# Altium PCB IMX6WBED.PcbDoc (part 9 of 10)
Units mil, origin at the board's own origin, x right, y up, seen from the top; angles counter-clockwise.
Board outline 3318.23 x 4815.16 mil, 6 copper layers (Top Layer, L2_GND_1, L3_INT_1, L6_INT_2, L7_PWR_2, Bottom Layer), stack 27.7 mil thick; 504 components, 400 nets, 2357 pads, 1199 vias.
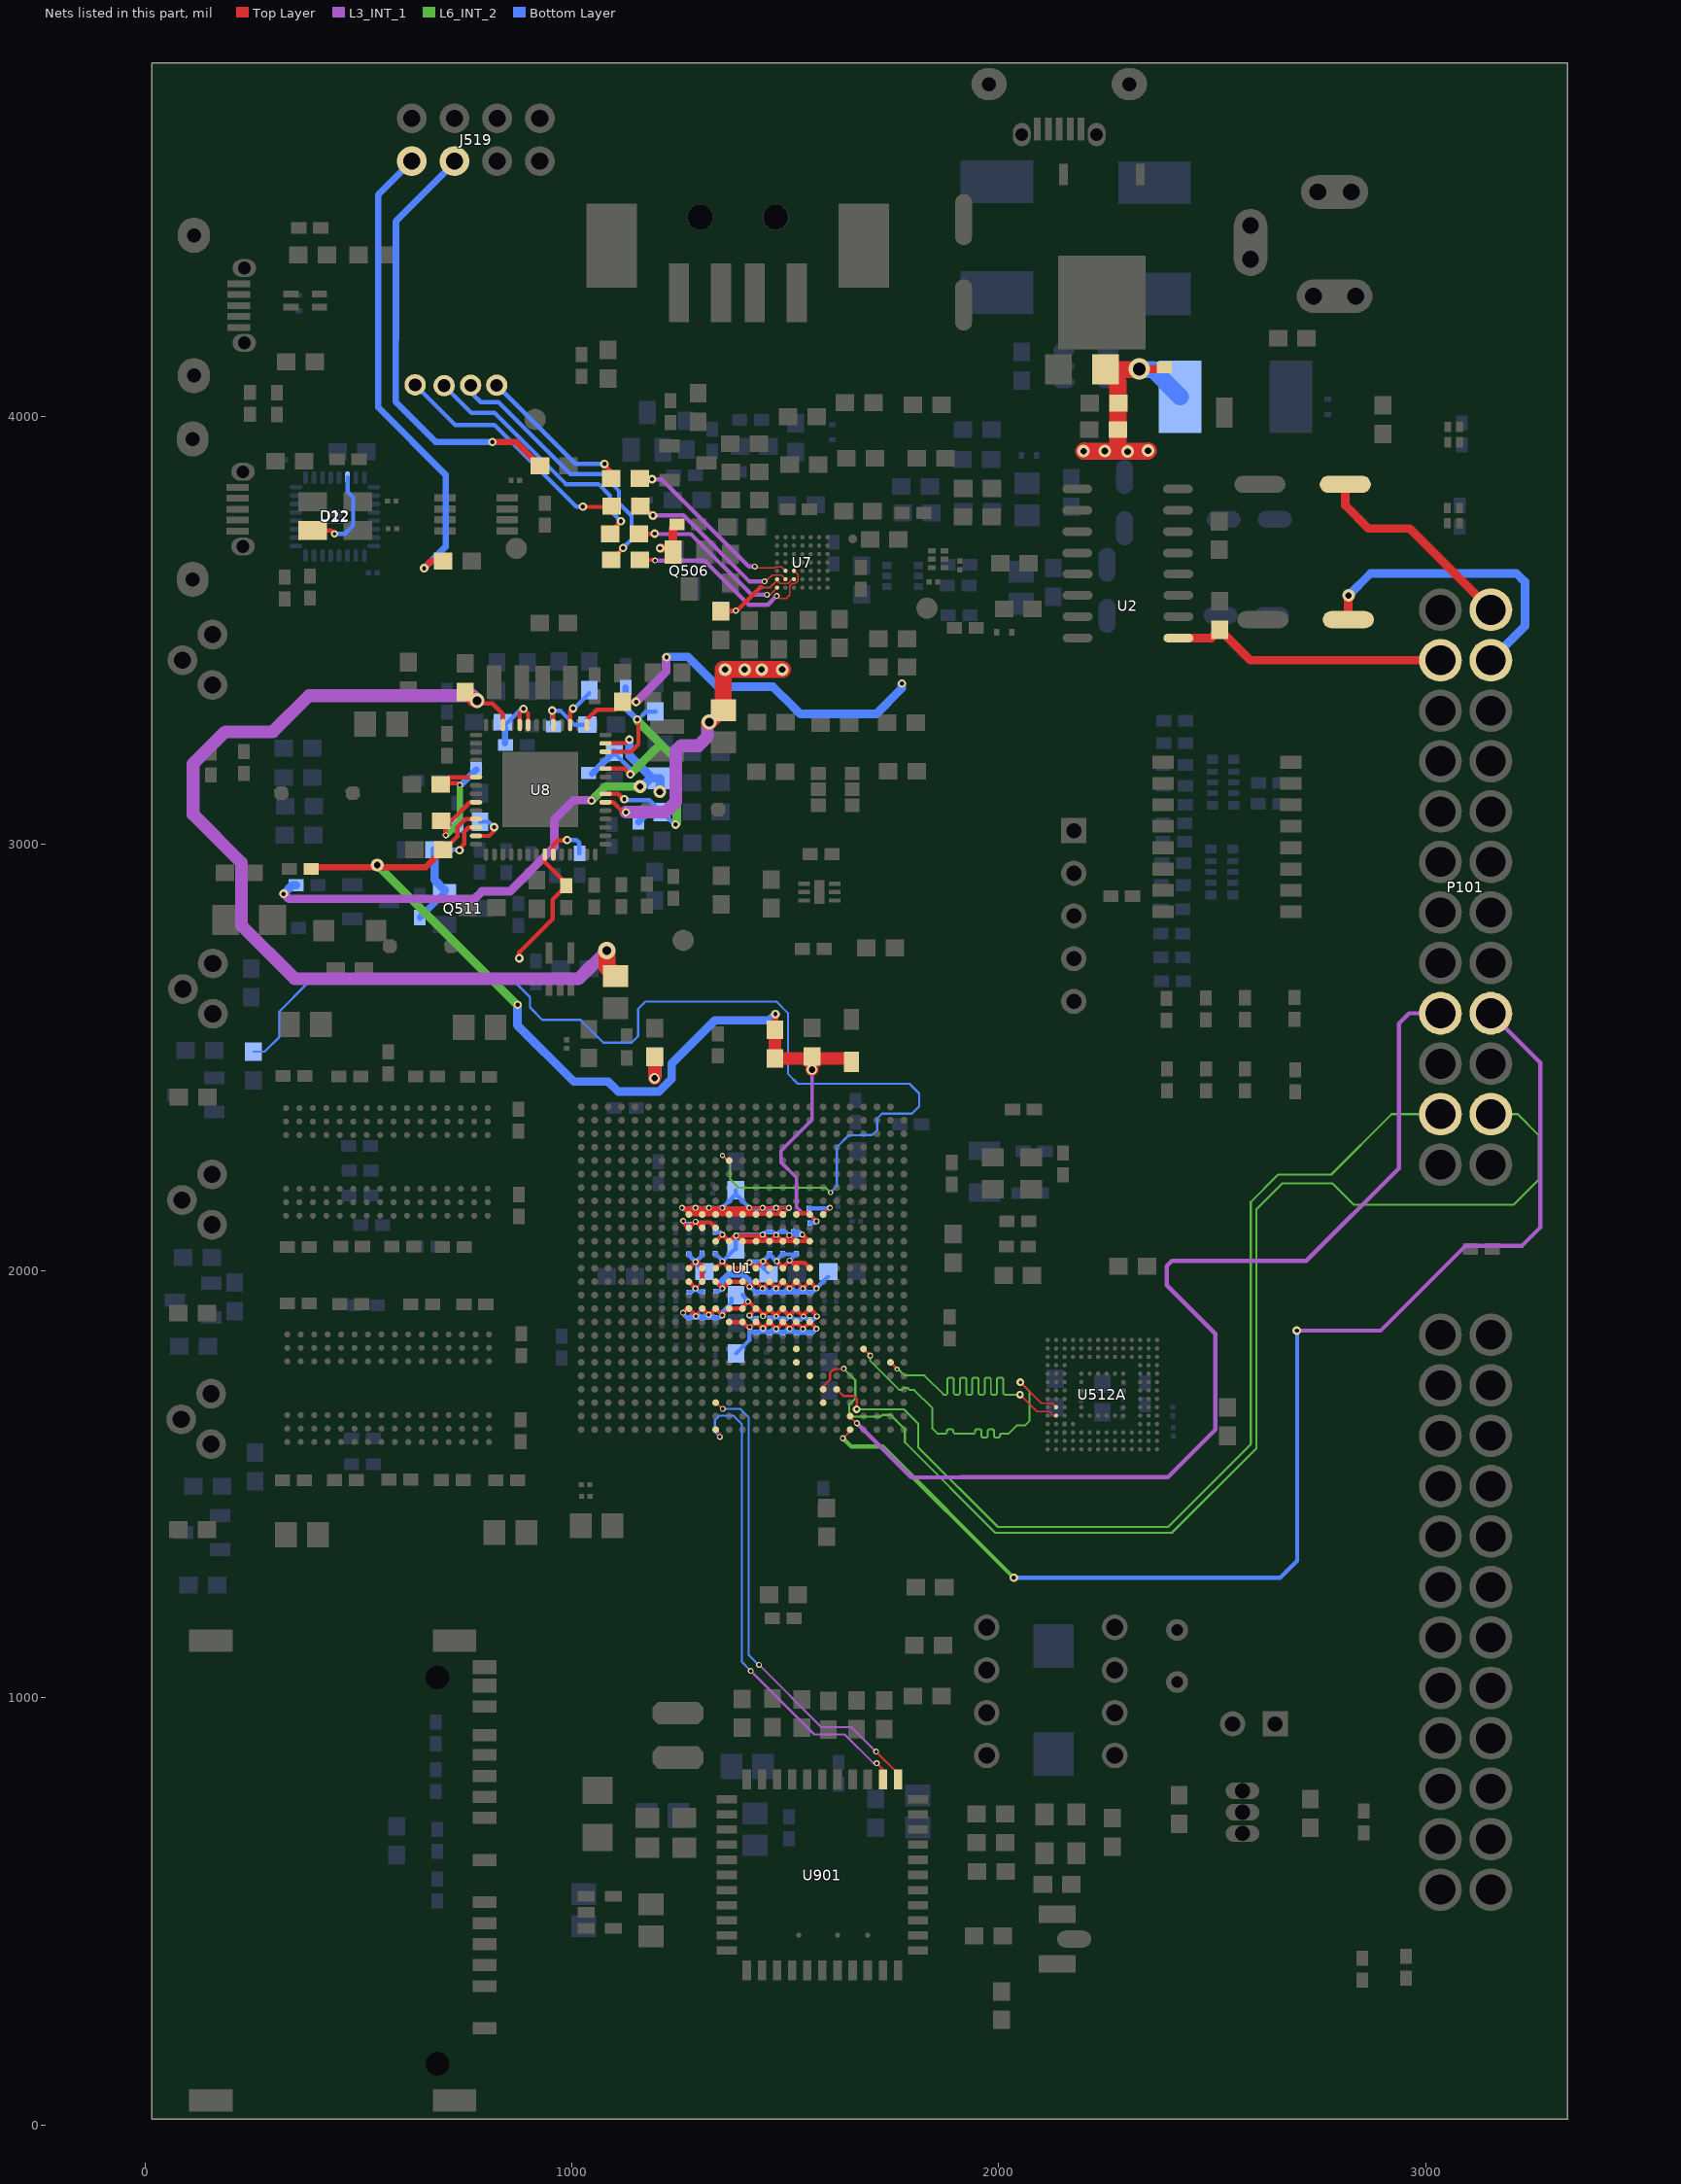
[diagram p13: the nets of this part, all layers, seen from the top]

## Via types
v1: diameter 14, hole 8, Top Layer to Bottom Layer, 296 vias
v2: diameter 14, hole 8, Top Layer to Bottom Layer, tented both sides, 244 vias
v3: diameter 20, hole 10, Top Layer to Bottom Layer, 221 vias
v4: diameter 20, hole 10, Top Layer to Bottom Layer, tented both sides, 112 vias
v5: diameter 18, hole 8, Top Layer to Bottom Layer, tented both sides, 74 vias
v6: diameter 12, hole 6, Top Layer to Bottom Layer, tented both sides, 60 vias
v7: diameter 16, hole 8, Top Layer to Bottom Layer, 59 vias
v8: diameter 30, hole 15, Top Layer to Bottom Layer, 33 vias
v9: diameter 40, hole 20, Top Layer to Bottom Layer, 16 vias
v10: diameter 30, hole 15, Top Layer to Bottom Layer, tented both sides, 16 vias
v11: diameter 18, hole 8, Top Layer to Bottom Layer, 16 vias
v12: diameter 12, hole 6, Top Layer to Bottom Layer, 13 vias
v13: diameter 16, hole 8, Top Layer to Bottom Layer, tented both sides, 8 vias
v14: diameter 80, hole 40, Top Layer to Bottom Layer, 5 vias
v15: diameter 14, hole 6, Top Layer to Bottom Layer, tented both sides, 4 vias
v16: diameter 50, hole 30, Top Layer to Bottom Layer, 3 vias
v17: diameter 16, hole 10, Top Layer to Bottom Layer, 3 vias
v18: diameter 25, hole 15, Top Layer to Bottom Layer, tented both sides, 3 vias
v19: diameter 35, hole 20, Top Layer to Bottom Layer, tented both sides, 3 vias
v20: diameter 10, hole 6, Top Layer to Bottom Layer, 3 vias
v21: diameter 18, hole 10, Top Layer to Bottom Layer, tented both sides, 2 vias
v22: diameter 80, hole 45, Top Layer to Bottom Layer, 1 vias
v23: diameter 40, hole 20, Top Layer to Bottom Layer, tented both sides, 1 vias
v24: diameter 11, hole 6, Top Layer to Bottom Layer, tented both sides, 1 vias
v25: diameter 13, hole 6, Top Layer to Bottom Layer, tented both sides, 1 vias
v26: diameter 14, hole 6, Top Layer to Bottom Layer, 1 vias

## Nets (pads, with @x,y where several pads share a name; then routed paths per layer and width w, separated by ;. In a path a pad name is that pad's centre, name@x,y a point inside that pad or via, vN(x,y) a via of type N, cw(c..) or ccw(c..) an arc to the next point about the centre after c; other vN are vias at no path point) (continued)
SD4_DATA6: U1.B20 U512A.B5 | length 806.5
  Top Layer w3: v5(2049.47,1709.9) 2089.23,1670.14 2118.41,1670.14 2127.91,1660.64 U512A.B5@2134.16,1660.64
  Top Layer w6: U1.B20@1745.97,1785.48 v6(1761.72,1769.73)
  L6_INT_2 w4.5: v6(1761.72,1769.73) 1764.64,1769.73 1764.64,1768.73 1778.47,1754.9 1825.47,1754.9 1870.47,1709.9 1872.47,1709.9 1876.82,1709.9 1879.72,1712.8 1879.72,1747 1882.62,1749.9 1891.32,1749.9 1894.22,1747 1894.22,1712.8 1897.12,1709.9 1905.82,1709.9 1908.72,1712.8 1908.72,1747 1911.62,1749.9 1920.32,1749.9 1923.22,1747 1923.22,1712.8 1926.12,1709.9 1934.82,1709.9 1937.72,1712.8 1937.72,1747 1940.62,1749.9 1949.32,1749.9 1952.22,1747 1952.22,1712.8 1955.12,1709.9 1963.82,1709.9 1966.72,1712.8 1966.72,1747 1969.62,1749.9 1978.32,1749.9 1981.22,1747 1981.22,1712.8 1984.12,1709.9 1992.82,1709.9 1995.72,1712.8 1995.72,1747 1998.62,1749.9 2007.32,1749.9 2010.22,1747 2010.22,1712.8 2013.12,1709.9 2024.72,1709.9 2039.22,1709.9 2043.47,1709.9 v5(2049.47,1709.9)
SD4_DATA7: U1.D19 U512A.B6 | length 805.7
  Top Layer w3: v5(2050.47,1738.9) 2099.47,1689.9 2124.58,1689.9 U512A.B6@2134.16,1680.33
  Top Layer w6: U1.D19@1682.98,1816.97 v2(1698.73,1801.22)
  L6_INT_2 w4.5: v2(1698.73,1801.22) 1698.73,1788.97 1766.8,1720.9 1772.62,1720.9 1777.62,1725.9 1786.32,1725.9 1791.32,1720.9 1801.62,1720.9 1844.47,1678.05 1844.47,1630.27 1855.84,1618.9 1875.82,1618.9 1878.72,1621.8 1878.72,1626 1881.62,1628.9 1890.32,1628.9 1893.22,1626 1893.22,1621.8 1896.12,1618.9 1941.82,1618.9 1944.72,1621.8 1944.72,1626 1947.62,1628.9 1956.32,1628.9 1959.22,1626 1959.22,1611.8 1962.12,1608.9 1970.82,1608.9 1973.72,1611.8 1973.72,1626 1976.62,1628.9 1985.32,1628.9 1988.22,1626 1988.22,1611.8 1991.12,1608.9 1999.82,1608.9 2002.72,1611.8 2002.72,1616 2005.62,1618.9 2023.22,1618.9 2042.47,1638.15 2061.72,1638.15 2071.47,1647.9 2071.47,1717.9 v5(2050.47,1738.9)
SPKLN: L550.1 LN.9 | length 366.5
  Top Layer w10: v3@1076.47,3887.03 1092.01,3871.49 L550.1@1092.01,3855.9
  Bottom Layer w10: LN.9@823.47,4073.9 1007.89,3889.48 v3(1075.98,3889.48)
SPKLP: L551.1 LP.9 | length 605.4
  Top Layer w10: L551.1@1090.01,3725.9 1090.01,3730.99 v3(1114.63,3755.61)
  Bottom Layer w10: LP.9@700.47,4072.9 764.13,4009.24 818.68,4009.24 985.64,3842.28 1061.88,3842.28 1089.14,3815.02 1089.14,3781.1 v3(1114.63,3755.61)
SPKOUTL: P101.3 R3.2 U2.5 | length 651.8
  Top Layer w20: U2.5@2420.47,3481.9 2497.93,3481.9 R3.2@2517.47,3501.44 2589.12,3429.79 P101.3@3034.47,3429.79
SPKOUTL_LOOP: C1.2 P101.4 | length 713.4
  Top Layer w20: C1.2@2818.47,3524.9 v8@2818.47,3578.7
  Bottom Layer w20: v8(2819.18,3581.7) 2870.71,3633.23 3212.67,3633.23 3232.48,3613.42 3232.48,3509.69 P101.4@3152.58,3429.79
SPKOUTLN: L550.2 U7.B3 | length 403.4
  Top Layer w3: v1(1428.37,3649.38) 1431.42,3646.33 1450.64,3646.33 1450.71,3646.4 1474.17,3646.4 1476.69,3648.92 1490.49,3648.92 U7.B3@1500.15,3639.26
  L3_INT_1 w10: v3@1187.43,3853.12 1210.34,3853.12 1414.08,3649.38 v1(1428.37,3649.38)
  other v3: 1187.43,3854
SPKOUTLP: L551.2 U7.A1 | length 386
  Top Layer w3: v1@1458.89,3583.82 1464.39,3583.82 U7.A1@1480.47,3599.9
  Top Layer w10: L551.2@1156.93,3725.9 1192.98,3725.9 v3(1193.41,3726.33)
  L3_INT_1 w10: v3@1194.8,3725.17 1278.67,3725.17 1420.54,3583.3 v1(1457.07,3583.3)
SPKOUTR_LOOP: C5.2 P101.2 | length 491.7
  Top Layer w20: C5.2@2811.47,3841.9 2811.47,3792.7 2865.68,3738.49 2961.99,3738.49 P101.2@3152.58,3547.9
SPKOUTRN: L552.2 U7.C3 | length 485
  Top Layer w3: v1@1478.71,3580.02 v1@1478.71,3583.11 ; v1(1479.58,3580.58) 1486.05,3574.11 1502.17,3574.11 1510.33,3582.27 1510.33,3603.84 1515.89,3609.4 1523.08,3609.4 1529.33,3615.64 1529.33,3629.76 U7.C3@1519.83,3639.26
  Top Layer w10: L552.2@1158.93,3664.9 1193.35,3664.9 v1(1194.55,3663.7)
  L3_INT_1 w10: v1@1195.45,3663.68 1309.58,3663.68 1413.74,3559.52 1458.52,3559.52 v1(1479.58,3580.58)
SPKOUTRP: L553.2 U7.B2 | length 416
  Top Layer w3: v1@1456.88,3617.49 1468.84,3629.45 1490.28,3629.45 U7.B2@1500.15,3619.58
  Top Layer w10: L553.2@1159.93,3790.9 1167.47,3790.9 v3(1189.57,3768.8)
  L3_INT_1 w10: v3@1190.55,3769.46 1260.49,3769.46 1415.25,3614.7 v1(1451.37,3614.7)
SPKRN: L552.1 RN.9 | length 651.8
  Top Layer w10: L552.1@1092.01,3664.9 v3@1119.64,3692.53
  Bottom Layer w10: RN.9@766.47,4074.9 766.47,4053.76 786.11,4034.12 827.76,4034.12 995.62,3866.26 1070.05,3866.26 1109.97,3826.34 1109.97,3797.55 1139.57,3767.95 1139.57,3712.89 v3(1119.64,3692.96)
SPKRP: L553.1 RP.9 | length 576.3
  Top Layer w10: v3@1028.73,3789 1091.11,3789 L553.1@1093.01,3790.9
  Bottom Layer w10: RP.9@632.47,4074.9 726.44,3980.93 818.4,3980.93 1009.95,3789.38 v3(1025.41,3789.38)
SPKVDD: C541.2 L508.2 U7.A2 U7.C2 | length 244.1
  Top Layer w3: U7.A2@1480.47,3616.9 1487.29,3610.08 1506.06,3610.08 1515.56,3619.58 U7.C2@1519.83,3619.58
  Top Layer w4.7: 1443.75,3600.35 1463.92,3600.35 1480.47,3616.9 U7.A2@1480.47,3619.58
  Top Layer w10: C541.2@1348.47,3544.36 1349.75,3545.64 v1@1386.53,3545.64 ; v1@1387.78,3547.33 1440.8,3600.35 1443.75,3600.35
  Bottom Layer w10: L508.2@1348.47,3545.36 1383.51,3545.36 v1@1383.66,3545.21
  other v1: 1383.7,3545.85
SYS_4V2: C501.2 C505.2 C506.2 C551.1 C552.2 C563.2 C564.2 C568.2 C569.2 C572.1 C573.2 C575.2 C576.2 C578.2 C579.2 C580.1 C582.2 C586.2 C599.2 D502.B Q506.2 Q511.2 R501.1 R557.1 R589.2 U8.7 U8.10 U8.12 U8.20 U8.23 U8.24 U8.34 U8.37 U8.40 U8.50 | length 3302.8
  Top Layer w10: C572.1@691.93,3141.9 733.47,3141.9 733.47,3139.9 v2@737.47,3135.9 ; C580.1@692.93,3053.9 703.47,3043.36 v2@703.47,3019.9 ; C580.1@705.93,3053.9 717.47,3053.9 760.89,3097.33 U8.37@775.19,3097.33 ; C572.1@709.47,3136.36 709.47,3155.9 774.71,3155.9 U8.34@775.19,3156.38 ; v4(736.47,2984.9) 736.47,2988.81 747.47,2999.81 747.47,3028.27 757.47,3038.27 U8.40@775.19,3038.27 ; v4(876.47,2731.9) 876.47,2745.9 954.47,2823.9 954.47,2869.49 C599.2@986.47,2901.49 ; U8.24@877.43,3278.17 877.43,3305.86 v4@885.47,3313.9 ; v4(886.47,3315.9) 897.11,3305.26 U8.23@897.11,3278.17 U8.23@897.11,3283.26 ; U8.50@936.47,2974.9 936.47,2956.9 C599.2@992.47,2900.9 ; v4(953.47,3311.9) 956.15,3309.22 U8.20@956.15,3278.17 ; U8.7@1078.47,3117.01 1108.36,3117.01 v4@1121.97,3103.4 ; U8.10@1078.47,3176.07 1123.3,3176.07 v4(1136.47,3162.9) ; U8.12@1078.47,3215.43 1137.93,3215.43 1155.47,3232.97 v4@1155.47,3287.9
  Top Layer w20: C572.1@691.93,3141.9 C572.1@696.93,3136.9 ; v3@1207.46,3691.99 1227.38,3691.99 Q506.2@1236.47,3682.9 1236.47,3738.49 R557.1@1245.88,3747.9 ; v16(2328.65,4111.78) 2383.76,4111.78 R501.1@2387.88,4115.9
  Top Layer w40: v10@2199.5,3920.9 v10(2198.26,3919.66) 2295.66,3919.66 2348.23,3919.66 v10(2349.47,3920.9) ; 2278.93,3936.39 C506.2@2278.93,3969.9 2278.93,4081.55 C501.2@2249.59,4110.9 2327.77,4110.9 v16(2328.65,4111.78)
  L6_INT_2 w15: v2(704.47,3019.9) 737.47,3052.9 v2(737.47,3137.9)
  L6_INT_2 w20: v4(1136.47,3162.9) 1206.65,3233.08 ; v4@1152.47,3288.9 1245.47,3195.9 v4@1245.47,3047.79
  Bottom Layer w10: C586.2@680.47,2985.9 v4@736.47,2985.9 ; Q511.2@701.47,2885.31 Q511.2@701.47,2891.9 ; C552.2@839.93,3274.9 880.93,3315.9 v4(886.47,3315.9) ; C563.2@957.06,3274.9 953.47,3278.49 v4(953.47,3311.9) 972.47,3311.9 1005.47,3278.9 C551.1@1036.01,3278.9 ; C573.2@1098.47,3208.9 C573.2@1098.47,3212.9 ; C573.2@1098.47,3217.9 C573.2@1098.47,3212.9 ; v4(1122.4,3104.56) 1122.4,3102.97 1123.47,3101.9 1180.93,3101.9 C578.2@1208.47,3074.36 ; 1136.47,3174.9 C573.2@1098.47,3212.9 ; v4@1155.47,3291.9 1173.01,3309.44 C568.2@1195.47,3309.44 ; C578.2@1210.47,3074.36 1239.88,3044.95 v4(1242.63,3044.95)
  Bottom Layer w15: R589.2@643.47,2827.31 Q511.2@701.47,2885.31 ; v2(704.47,3019.9) 729.88,3045.31 C582.2@736.47,3045.31 ; v2(737.47,3137.9) 740.06,3137.9 C575.2@775.47,3173.31 ; C552.2@839.93,3274.9 842.88,3271.96 C564.2@842.88,3235.9 ; C576.2@1047.06,3163.9 1098.47,3215.3 C573.2@1098.95,3215.3 ; C569.2@1125.47,3366.31 1125.47,3317.9 v4(1152.47,3290.9) ; C579.2@1155.47,3050.49 1179.34,3074.36 1208.47,3074.36 C578.2@1210.01,3074.36
  Bottom Layer w20: C586.2@677.93,2985.9 677.93,2915.44 Q511.2@701.47,2891.9
  Bottom Layer w40: v16@2333.1,4110.19 2361.18,4110.19 D502.B@2424.47,4046.9
  other v3: 1206.56,3692.21
  other v8: 2301.69,3918.62 2248.03,3919.96
TXLED: D12.4 U22.22 | length 222.2
  Top Layer w10: D12.4@392.17,3733.98 435.39,3733.98 v5(443.47,3725.9)
  Bottom Layer w10: v5@445.47,3725.9 467.47,3725.9 487.47,3745.9 487.47,3810.9 474.07,3824.3 U22.22@474.07,3857.6
U1_RX: J519.6 U1_RX.2 | length 1016.2
  Top Layer w15: v3@815.64,3940.62 869.29,3940.62 U1_RX.2@925.01,3884.9
  Bottom Layer w15: J519.6@725.14,4595.85 587.44,4458.15 587.44,4182.67 586.82,4182.05 586.82,4035.09 680.74,3941.17 v3(813.63,3941.17)
U1_TX: J519.5 U1-TX.2 | length 1115.4
  Top Layer w15: v3@655.82,3648.44 669.28,3661.9 U1-TX.2@698.01,3661.9
  Bottom Layer w15: J519.5@621.72,4595.85 546.43,4520.56 546.43,4021.65 703.75,3864.33 703.75,3695.52 v3(653.57,3645.34)
U2RXD: P101.18 U1.E25 | length 2998.4
  Top Layer w5: v1@1636.38,1609.16 1651.49,1624.27 U1.E25@1651.49,1628
  L3_INT_1 w10: v3(2697.89,1859.83) 2894.73,1859.83 3093.72,2058.82 3225.84,2058.82 3268.11,2101.09 3268.11,2487.49 P101.18@3152.58,2603.02
  L6_INT_2 w10: v1(1634.63,1607.72) 1654.25,1588.1 1727.45,1588.1 2032.81,1282.74 v3@2032.81,1281.91
  Bottom Layer w10: v3(2035.16,1281.27) 2659.09,1281.27 2698.79,1320.97 2698.79,1860.13 v3@2698.41,1860.51
U2TXD: P101.17 U1.E24 | length 2475.8
  Top Layer w5: U1.E24@1651.49,1659.49 1651.49,1658.11 v1@1666.19,1643.41
  L3_INT_1 w10: v1(1667.63,1643.06) 1794.59,1516.1 1908.93,1516.1 1909.1,1516.27 2395.62,1516.27 2507.25,1627.9 2507.25,1852.21 2393.48,1965.98 2393.48,2010.97 2405.43,2022.92 2719.99,2022.92 2937.07,2240 2937.07,2579.18 2960.91,2603.02 P101.17@3034.47,2603.02
U3RXD: P101.22 U1.G22 | length 2902.5
  Top Layer w5: U1.G22@1588.49,1722.48 1588.49,1729.47 1604.43,1745.41 1604.43,1760.92 1613.54,1770.03 v1@1634.59,1770.03
  L6_INT_2 w5: v1(1636.63,1770.78) 1663.71,1743.7 1663.71,1700.52 1649.24,1686.05 1649.24,1666.29 1657.29,1658.24 1722.68,1658.24 1726.69,1662.25 1746.33,1662.25 1779.63,1628.95 1779.63,1598.4 1991.8,1386.23 2405.32,1386.23 2603.48,1584.39 2603.48,2144.47 2663.36,2204.35 2781.8,2204.35 2831.87,2154.28 3205.48,2154.28 3265.17,2213.97 3265.17,2317.01 3215.38,2366.8 P101.22@3152.58,2366.8
U3TXD: P101.21 U1.F22 | length 2326.8
  Top Layer w5: U1.F22@1619.99,1722.48 1635.62,1706.85 1660.3,1706.85 1667.21,1699.94 v11@1667.21,1676.74
  L6_INT_2 w5: v11(1666.92,1675.52) 1777.23,1675.52 1811.19,1641.56 1811.19,1586.42 1997.68,1399.93 2396.71,1399.93 2590.21,1593.43 2590.21,2161.19 2654.01,2224.99 2778.36,2224.99 2920.17,2366.8 P101.21@3034.47,2366.8
UART2_CTS_B: U1.G23
UART2_RTS_B: U1.J19
UART3_CTS_B: U1.J20
UART3_RTS_B: U1.H21
VCOREDIG: C600.2 U8.51 | length 113.6
  Top Layer w10: U8.51@956.15,2974.9 956.15,2997.58 966.47,3007.9 v4@986.47,3007.9
  Bottom Layer w10: v4(988.47,3008.9) 1010.47,3008.9 1017.47,3001.9 C600.2@1017.47,2977.49
VDD_ARM_CAP: C658.2 C659.2 C660.2 C663.2 C669.2 C670.2 C671.2 C672.2 C677.2 C679.2 U1.H11 U1.H13 U1.J11 U1.J13 U1.K11 U1.K13 U1.L11 U1.L13 U1.M11 U1.M13 U1.N11 U1.N13 U1.P11 U1.P13 U1.R11 U1.R13 | length 1323.6
  Top Layer w6: v2@1383.77,2084.69 U1.N11@1399.52,2068.94
  Top Layer w10: U1.R13@1336.53,2005.95 v2(1352.27,2021.7) U1.P13@1368.02,2005.95 U1.N13@1399.52,2005.95 1415.27,2021.7 U1.M13@1431.01,2005.95 ; U1.R11@1336.53,2068.94 v2(1352.27,2084.69) U1.P11@1368.02,2068.94 v2@1383.77,2084.69 ; U1.M13@1431.01,2008.44 v2@1445.97,2023.4 ; U1.M11@1431.01,2068.94 U1.N11@1399.52,2068.94 1384.93,2083.53 v2(1384.53,2082.31) 1445.71,2082.31 v2(1446.76,2084.69) ; v2@1448.97,2023.4 1462.51,2009.86 U1.L13@1462.51,2005.95 ; v2@1477.47,2083.9 U1.L11@1462.51,2068.94 v2(1446.76,2084.69) ; v2(1478.47,2083.9) 1493.43,2068.94 U1.K11@1494.01,2068.94 1495.51,2068.94 v2(1509.47,2082.9) 1511.54,2082.9 U1.J11@1525.5,2068.94 U1.J11@1523.43,2068.94 ; v2(1479.47,2021.9) 1494.01,2007.36 U1.K13@1494.01,2005.95 1494.01,2008.44 v2(1509.47,2023.9) 1514.93,2018.44 1544.5,2018.44 U1.H13@1557,2005.95 ; v2@1511.47,2022.9 1525.5,2008.87 U1.J13@1525.5,2005.95 ; v2(1539.35,2084.48) 1539.89,2084.48 1555.43,2068.94 U1.H11@1557,2068.94 1556.68,2069.26 1431.33,2069.26 v2(1446.76,2084.69) ; U1.H13@1557,2010.37 U1.H13@1557,2005.95 ; U1.H13@1557,2010.57 U1.H13@1557,2005.95
  Bottom Layer w10: C677.2@1335.47,2040.9 1352.27,2024.1 v2(1352.27,2021.7) C669.2@1381.01,2050.44 ; C663.2@1335.47,2089.9 1347.06,2089.9 v2(1352.27,2084.69) ; C669.2@1383.47,2050.44 1383.77,2050.74 1383.77,2084.69 v2(1446.76,2084.69) 1452.97,2090.9 C660.2@1463.47,2090.9 ; C679.2@1459.01,1996.9 1436.01,2019.9 v2(1415.47,2019.9) 1417.47,2021.9 v2(1447.47,2021.9) C672.2@1463.47,2037.9 ; C672.2@1464.97,2039.4 C672.2@1463.47,2040.9 C672.2@1463.47,2037.9 ; 1471.47,2090.9 v2(1478.47,2083.9) 1486.47,2091.9 C659.2@1493.47,2091.9 1500.47,2091.9 v2(1509.47,2082.9) ; v2(1479.47,2021.9) C672.2@1463.47,2037.9 ; v2@1479.47,2024.9 1493.47,2038.9 C671.2@1493.47,2040.9 ; C671.2@1496.47,2040.9 C671.2@1493.47,2040.9 ; v2(1509.47,2023.9) 1525.47,2039.9 C670.2@1525.47,2040.9 1522.98,2038.41 1495.96,2038.41 C671.2@1493.47,2040.9 ; v2(1509.47,2082.9) C658.2@1518.47,2091.9 1532.47,2091.9 1539.89,2084.48 v2(1539.35,2084.48) 1537.77,2082.9 v2(1509.47,2082.9)
VDD_SNVS_CAP: C634.1 U1.G9 | length 69.3
  Top Layer w6: U1.G9@1588.49,2131.93 v2(1604.24,2147.68)
  Bottom Layer w10: C634.1@1555.47,2145.9 v2@1602.46,2145.9
VDDCORE: C643.2 C644.2 C645.2 C646.2 C649.2 C680.2 C685.2 C686.2 C687.2 C688.2 C689.2 C690.2 R27.1 U1.H14 U1.J14 U1.K9 U1.K14 U1.L9 U1.L14 U1.M9 U1.M14 U1.N9 U1.N14 U1.P9 U1.P14 U1.R9 U1.R14 U1.T9 U1.U9 U8.6 | length 2948.8
  Top Layer w6: U1.U9@1273.53,2131.93 v2(1257.79,2147.68) ; 1283.23,2141.62 1263.84,2141.62 v2(1257.79,2147.68) ; U1.T9@1305.03,2131.93 v2(1289.28,2147.68) 1295.36,2141.6 1314.7,2141.6 v2(1320.78,2147.68) ; U1.R9@1336.53,2131.93 v2(1320.78,2147.68) ; U1.P9@1368.02,2131.93 v2(1352.27,2147.68) ; U1.N9@1399.52,2131.93 v2(1415.27,2147.68) ; v2@1412.47,2145.86 v2@1414.29,2147.68 ; U1.M9@1431.7,2132.62 v2(1446.76,2147.68) ; U1.L9@1462.51,2131.93 v2(1478.26,2147.68) ; U1.K9@1494.01,2131.93 v2@1509.75,2147.68 ; v2(1508.07,2147.07) 1507.46,2147.68 v2(1352.27,2147.68) ; v2(1257.79,2147.68) v2(1352.27,2147.68) ; v2(1320.78,2147.68) 1326.74,2141.72 1346.31,2141.72 v2(1352.27,2147.68)
  Top Layer w10: U8.6@1078.47,3097.33 1096.04,3097.33 v4@1120.47,3072.9 ; v2(1289.28,2147.68) U1.U9@1278.81,2137.21 ; U1.T9@1305.03,2131.93 v2(1320.78,2147.68) ; U1.R14@1336.53,1974.45 v2(1352.27,1958.7) U1.P14@1368.02,1974.45 U1.N14@1399.52,1974.45 1403.69,1974.45 1416.35,1961.79 1418.36,1961.79 1431.01,1974.44 v2(1446.76,1958.7) U1.L14@1462.51,1974.45 v2(1478.26,1958.7) U1.K14@1494.01,1974.45 v2(1509.75,1958.7) U1.J14@1525.5,1974.45 v2(1541.25,1958.7) U1.H14@1557,1974.45 v2(1572.75,1958.7) ; U1.R9@1341.8,2137.21 U1.U9@1278.81,2137.21 ; R27.1@1347.87,3312.3 R27.1@1354.47,3312.3 ; 1421.8,2141.14 1345.74,2141.14 U1.R9@1336.53,2131.93 v2(1352.27,2147.68) 1358.77,2141.18 1408.77,2141.18 v2(1415.27,2147.68) 1430.07,2132.88 1493.06,2132.88 v2(1478.26,2147.68) ; U1.M9@1431.7,2132.62 1274.22,2132.62 U1.U9@1278.81,2137.21 ; v2(1446.76,2147.68) U1.L9@1462.51,2131.93
  Top Layer w30: v19(1321.49,3285.1) 1319.67,3285.1 1317.47,3282.9 1325.07,3282.9 R27.1@1354.47,3312.3
  Top Layer w40: R27.1@1354.47,3312.3 1354.47,3407.9 v10(1358.47,3407.9) v10(1404.47,3407.9) v10(1444.47,3407.9) v10(1492.47,3407.9)
  L3_INT_1 w30: v4(1126.47,3073.9) 1219.13,3073.9 1242.92,3097.69 1242.92,3217.16 1255.57,3229.81 1295.86,3229.81 1317.47,3251.42 1317.47,3282.9 1319.67,3285.1 v19(1321.49,3285.1)
  Bottom Layer w10: v2@1262.04,2143.43 C646.2@1273.53,2143.43 C644.2@1336.53,2143.43 ; C646.2@1277.79,2147.68 v2(1289.28,2147.68) C645.2@1300.78,2147.68 ; C645.2@1309.28,2147.68 v2(1320.78,2147.68) C644.2@1332.27,2147.68 ; C690.2@1336.47,1951.9 1345.47,1951.9 v2(1352.27,1958.7) ; C644.2@1340.78,2147.68 v2(1352.27,2147.68) C649.2@1383.47,2178.88 ; C649.2@1383.47,2188.44 1383.47,2179.48 v2(1415.27,2147.68) 1419.52,2143.43 C643.2@1462.51,2143.43 1466.76,2147.68 1509.75,2147.68 1509.14,2147.07 v2(1508.07,2147.07) ; v2(1415.8,1962.34) 1415.8,1959.23 1415.47,1958.9 1421.47,1958.9 C689.2@1431.47,1948.9 ; 1488.06,1948.9 v2(1478.26,1958.7) 1473.27,1958.7 1462.97,1948.4 1453.67,1957.7 1453.67,1958.7 v2(1446.76,1958.7) 1436.96,1948.9 C689.2@1431.47,1948.9 ; C687.2@1494.47,1948.9 1504.27,1958.7 v2(1509.75,1958.7) 1516.67,1958.7 C686.2@1526.47,1948.9 1536.27,1958.7 v2(1541.25,1958.7) 1551.05,1948.9 ; C680.2@1600.01,1985.96 v2(1572.75,1958.7) 1562.94,1948.9 C685.2@1557.47,1948.9 C689.2@1431.47,1948.9
  Bottom Layer w15: v2(1352.27,1958.7) 1352.27,1977.61 1365.99,1991.33 1400.24,1991.33 1415.8,1975.77 v2(1415.8,1962.34)
VDDHIGH_IN: C584.2 C623.2 C652.2 D10.1 R507.2 SH1.1 SH1.2 U1.H9 U1.J9 U8.39 | length 2507.7
  Top Layer w6: U1.H9@1557,2131.93 v2@1572.75,2118.68
  Top Layer w10: C584.2@706.93,2992.9 731.47,3017.44 731.47,3038.9 750.52,3057.96 U8.39@775.19,3057.96 ; U1.J9@1525.5,2131.93 1528.64,2135.07 U1.H9@1553.86,2135.07
  Top Layer w15: R507.2@392.06,2933.9 403.06,2944.9 656.93,2944.9 C584.2@697.93,2985.9 ; SH1.1@1475.47,2564.36 v4@1475.47,2600.9
  Top Layer w30: SH1.1@1475.47,2564.36 SH1.2@1475.47,2497.44 C623.2@1562.47,2497.44 ; v18(1561.99,2471.02) 1562.47,2471.5 C623.2@1562.47,2497.44 ; C623.2@1562.47,2501.44 C623.2@1562.47,2497.44 ; D10.1@1645.93,2497.44 C623.2@1562.47,2497.44
  L3_INT_1 w8: 1561.93,2452.44 1561.93,2353.04 1488.99,2280.1 1488.99,2254.62 1525.57,2218.04 1525.57,2149.87 1541.1,2134.34 1554.31,2134.34 v2(1572.75,2115.9) ; v18(1561.99,2471.02) 1562.03,2448.2
  L6_INT_2 w20: v10(543.62,2950.2) 870.96,2622.86 v3(872.44,2622.86)
  Bottom Layer w10: C652.2@1557.47,2111.9 1557.69,2112.12 v2@1568.97,2112.12
  Bottom Layer w20: v3@871.88,2620.15 871.88,2575.42 1004.04,2443.26 1084.65,2443.26 1108.03,2419.88 1204.09,2419.88 1233.58,2449.37 1233.58,2485.19 1334.87,2586.48 1462.05,2586.48 v4(1476.47,2600.9)
VDDPU: C710.2 C711.2 C712.2 C713.2 C714.2 C716.2 U1.H17 U1.J17 U1.K17 U1.L17 U1.M17 U1.N17 U1.P17 | length 783.4
  Top Layer w6: U1.N17@1399.52,1879.96 v2@1415.27,1864.22 ; U1.K17@1494.01,1879.96 v2(1509.75,1864.22) ; U1.J17@1525.5,1879.96 v2(1541.25,1864.22) ; U1.H17@1557,1879.96 v2(1572.75,1864.22) U1.H17@1557,1879.96
  Top Layer w10: U1.P17@1368.02,1879.96 U1.N17@1399.52,1879.96 v2@1415.27,1864.22 ; v2(1416.11,1868.18) 1416.11,1865.06 v2@1415.27,1864.22 ; v2@1476.47,1866 U1.L17@1462.51,1879.96 v2(1447.47,1864.9) 1432.41,1879.96 U1.M17@1431.01,1879.96 v2@1415.27,1864.22 ; v2(1478.47,1863.9) U1.K17@1494.01,1879.44 ; U1.K17@1494.01,1879.96 v2(1509.75,1864.22) U1.J17@1525.5,1879.96 v2(1541.25,1864.22) U1.H17@1557,1879.96 v2(1572.75,1864.22)
  Bottom Layer w6: C711.2@1526.47,1854.9 1517.15,1864.22 v2(1509.75,1864.22) ; v2(1509.75,1864.22) 1502.79,1864.22 C714.2@1493.47,1854.9 1500.44,1854.9 v2(1509.75,1864.22)
  Bottom Layer w10: C716.2@1384.47,1806.36 1415.27,1837.16 1415.27,1864.22 1423.58,1855.9 C710.2@1432.47,1855.9 ; C710.2@1431.47,1855.9 1432.47,1856.9 1524.47,1856.9 C711.2@1525.47,1855.9 ; 1438.47,1855.9 v2(1447.47,1864.9) C713.2@1457.47,1854.9 ; C713.2@1462.47,1854.9 1471.47,1863.9 v2(1478.47,1863.9) ; v2(1478.47,1863.9) 1487.51,1854.9 C714.2@1493.47,1854.9 ; C711.2@1526.47,1854.9 C712.2@1556.47,1854.9 ; C711.2@1531.93,1854.9 v2(1541.25,1864.22) 1550.57,1854.9 C712.2@1556.47,1854.9 ; v2(1572.75,1864.22) 1563.43,1854.9 C712.2@1556.47,1854.9
VDDSOC: C40.2 C604.2 C694.2 C698.2 C701.2 C702.2 C703.2 C704.2 C705.2 C706.2 C707.2 R21.1 R632.2 U1.H16 U1.J16 U1.K16 U1.L16 U1.M16 U1.N16 U1.P16 U1.R16 U1.T16 U1.U16 U8.13 | length 2415.5
  Top Layer w6: v2@1289.28,1895.71 U1.T16@1305.03,1911.46 ; v2(1352.27,1895.71) U1.P16@1368.02,1911.46 ; U1.N16@1399.52,1911.46 v2@1414.21,1926.16 ; v2(1415.65,1895.45) 1415.65,1895.76 1415.49,1895.93 1415.27,1895.93 1415.27,1895.71 U1.M16@1431.01,1911.46 ; U1.L16@1462.51,1911.46 v6@1478.26,1895.71 ; U1.K16@1494.01,1911.46 v6@1509.75,1895.71 ; U1.H16@1557,1911.46 v2@1571.56,1896.9
  Top Layer w10: U8.13@1078.47,3235.12 1079.25,3235.9 1128.47,3235.9 ; v2(1260.18,1901.75) 1260.18,1901.17 1260.53,1900.82 1261.02,1900.82 1261.44,1900.4 1260.85,1900.4 1260.2,1901.05 v2@1260.2,1900.46 ; v2@1262.55,1900.1 1260.61,1902.04 1270.03,1911.46 U1.U16@1273.53,1911.46 ; U1.U16@1271.78,1913.21 v2@1289.28,1895.71 ; U1.T16@1305.03,1911.46 v2@1318.47,1898.02 ; v2(1320.47,1896.9) 1321.97,1896.9 U1.R16@1336.53,1911.46 v2(1352.27,1895.71) ; U1.P16@1368.02,1911.46 U1.N16@1399.52,1911.46 1399.52,1914.95 v2(1412.47,1927.9) ; v2@1415.27,1927.21 U1.M16@1431.01,1911.46 1431.01,1910.81 v2(1415.65,1895.45) ; U1.M16@1433.91,1911.46 v2@1445.47,1899.9 ; v2(1447.47,1893.9) U1.L16@1462.51,1908.94 ; U1.L16@1462.51,1911.46 1462.51,1909.38 v6(1478.17,1893.72) ; v6@1478.26,1895.71 U1.K16@1494.01,1911.46 1494.01,1909.35 v6(1509.76,1893.6) ; v6@1509.75,1895.71 U1.J16@1525.5,1911.46 ; U1.J16@1525.5,1908.87 v6@1540.47,1893.9 ; v6@1541.47,1895.93 U1.H16@1557,1911.46 1573.67,1894.79 v2(1573.67,1893.01)
  Top Layer w30: v18(1193.47,2450.9) C40.2@1193.47,2500.44
  L3_INT_1 w20: v4(324.47,2882.9) 336.47,2870.9 771.2,2870.9 788.85,2888.55 854.12,2888.55 958.47,2992.9 958.47,3056.33 1004.04,3101.9 v4@1046.47,3101.9
  L6_INT_2 w20: v4(1045.47,3100.9) 1078.47,3133.9 v10(1159.47,3133.9)
  Bottom Layer w10: v2@1258.47,1901.9 1260.47,1901.9 1260.61,1902.04 1262.55,1900.1 1262.55,1898.11 1260.2,1900.46 1260.2,1901.05 1260.85,1900.4 1261.44,1900.4 1261.02,1900.82 1260.53,1900.82 1260.18,1901.17 v2(1260.18,1901.75) ; v2@1263.47,1895.9 1269.47,1889.9 C707.2@1273.47,1889.9 ; v2(1290.41,1893.9) 1290.41,1894.58 v2@1289.28,1895.71 ; C694.2@1373.47,1934.9 1373.47,1924.9 1352.27,1903.7 v2(1352.27,1895.71) 1346.46,1889.9 C705.2@1335.47,1889.9 ; C694.2@1399.11,1943.36 v2@1413.52,1928.95 ; v2(1415.65,1895.45) 1415.65,1895.76 1415.49,1895.93 1415.27,1895.93 1415.27,1895.71 1423.2,1887.78 C704.2@1432.24,1887.78 ; C703.2@1463.47,1888.9 1473.35,1888.9 v6(1478.17,1893.72) ; v6@1480.26,1893.71 1487.07,1886.9 ; C702.2@1494.47,1886.9 1503.06,1886.9 v6(1509.76,1893.6) ; v6@1511.17,1894.3 1519.72,1885.75 1536.32,1885.75 v6@1539.47,1888.9 ; v6@1542.25,1890.9 1545.67,1890.9 C698.2@1551.74,1884.83 ; C698.2@1559.47,1884.9 1564.91,1884.9 v2@1572.19,1892.18 ; C707.2@1273.47,1889.9 C706.2@1304.47,1889.9 ; C707.2@1273.47,1889.9 1283.47,1889.9 v2@1289.28,1895.71 ; C707.2@1273.47,1889.9 C705.2@1335.47,1889.9 ; C707.2@1273.47,1889.9 1279.28,1895.71 v2@1289.28,1895.71 ; v2@1289.28,1895.71 1298.66,1895.71 C706.2@1304.47,1889.9 ; C706.2@1304.47,1889.9 1311.47,1896.9 v2(1320.47,1896.9) 1328.47,1896.9 C705.2@1335.47,1889.9
  Bottom Layer w20: v4(324.47,2882.9) 344.47,2902.9 R632.2@353.88,2902.9 ; v4(1134.47,3243.9) 1134.63,3243.74 1134.63,3206.44 1187.57,3153.5 R21.1@1206.47,3153.5 ; v10@1161.47,3131.9 1183.07,3153.5 R21.1@1206.47,3153.5 ; v10(1205.47,3121.9) 1206.47,3122.9 R21.1@1206.47,3153.5 ; v10@1206.47,3116.9 R21.1@1206.47,3153.5
  Bottom Layer w30: v18@1193.47,2454.9 C604.2@1193.47,2501.44
  other v6: 1542.31,1893.35
VDDSOC_CAP: C656.2 C661.2 C674.2 C676.2 C682.2 C691.2 C692.2 U1.R10 U1.T10 U1.T13 U1.T14 U1.U10 U1.U13 U1.U14 | length 443.8
  Top Layer w6: v2(1289.28,1958.7) U1.T14@1305.03,1974.45 ; v2(1289.47,2114.9) 1303.93,2100.44 U1.T10@1305.03,2100.44
  Top Layer w10: v2(1260.47,2116.9) 1258.5,2116.9 1257.79,2116.18 U1.U10@1273.53,2100.44 1288,2114.9 v2(1289.47,2114.9) ; U1.U14@1273.53,1974.45 v2(1289.28,1958.7) ; U1.U13@1273.53,2005.95 1274.52,2005.95 v2(1289.47,2020.9) ; v2@1292.47,2021.9 1305.03,2009.34 U1.T13@1305.03,2005.95 U1.T14@1305.03,1974.45 ; U1.T10@1305.03,2100.44 1290.57,2114.9 v2(1289.47,2114.9) ; U1.R10@1336.53,2100.44 1323.21,2113.75 1290.62,2113.75 v2(1289.47,2114.9)
  Bottom Layer w6: C656.2@1274.47,2108.9 1280.47,2108.9 v2@1288.47,2116.9 ; v2(1289.47,2114.9) 1294.47,2109.9 C661.2@1305.47,2109.9
  Bottom Layer w10: v2(1260.47,2116.9) 1258.5,2116.9 1257.97,2116.37 1257.97,2116.02 1265.09,2108.9 C656.2@1274.47,2108.9 ; C676.2@1273.47,2039.9 1273.47,2036.9 v2(1289.47,2020.9) ; C692.2@1274.47,1949.9 1280.48,1949.9 v2(1289.28,1958.7) 1297.09,1950.9 C691.2@1306.47,1950.9 ; C674.2@1304.47,2041.9 1304.47,2035.9 v2(1289.47,2020.9) ; C682.2@1309.93,1997.9 1289.47,2018.36 v2(1289.47,2020.9)
VGEN1_1V5: C556.1 U8.16 | length 917.5
  Top Layer w10: U8.16@1034.87,3278.17 1034.87,3290.82 1057.95,3313.9 1099.93,3313.9 C556.1@1118.47,3332.44 v4(1150.01,3332.44)
  L3_INT_1 w20: v4(1150.01,3332.44) 1220.47,3402.9 v4@1220.47,3434.9
  Bottom Layer w20: v4@1221.47,3437.9 1271.47,3437.9 1341.47,3367.9 1470.47,3367.9 1495.93,3342.44 1496.93,3342.44 1535.47,3303.9 1712.47,3303.9 1772.35,3363.78 v4@1772.35,3373.42
  other v4: 1772.76,3375.07 1221.47,3436.9
VGEN2_1V5: C550.2 U8.18 | length 93.6
  Top Layer w10: U8.18@995.51,3278.17 995.51,3309.94 v4(1002.47,3316.9)
  Bottom Layer w10: v4@1003.7,3315.67 C550.2@1040.47,3352.44
VGEN3_2V5: C554.2 R85.2 U8.26 | length 2304.8
  Top Layer w10: C554.2@749.47,3355.44 C554.2@757.44,3355.44 ; v19@777.72,3328.4 813.66,3328.4 837.47,3304.59 837.47,3278.77 U8.26@838.07,3278.17
  Top Layer w30: C554.2@749.47,3355.44 769.75,3335.16 v19(777.72,3335.16)
  Top Layer w40: v23(1081.48,2749.79) 1081.48,2711.29 R85.2@1102.47,2690.3
  L3_INT_1 w30: v19@777.72,3337.12 768.11,3346.73 383.81,3346.73 299.44,3262.36 187.69,3262.36 112.43,3187.1 112.43,3068.6 225.61,2955.42 225.61,2808.36 350.05,2683.92 1015.61,2683.92 v23(1081.48,2749.79)
VGEN6_3V3: C595.2 U8.41 | length 85.2
  Top Layer w10: U8.41@775.19,3018.59 806.15,3018.59 v4@817.47,3029.9
  Bottom Layer w10: C595.2@784.47,3051.44 804.93,3051.44 v4(817.47,3038.9)
WL_HOST: U1.R25 U901.13 | length 1155.2
  Top Layer w5: U1.R25@1336.53,1628 1346.58,1617.94 v1@1346.58,1610.17 ; v1(1713.66,846.72) 1728.29,832.09 U901.13@1728.29,808.95
  L3_INT_1 w5: v1(1418.48,1062.98) 1567.5,913.96 1638.93,913.96 1705.8,847.09 v1@1713.36,847.09
  Bottom Layer w5: v1(1346.35,1610.63) 1334.69,1622.29 1334.69,1650.1 1345.47,1660.88 1377.59,1660.88 1397.69,1640.78 1397.69,1083.84 v1@1417.54,1063.99
WL_REG: U1.R23 U901.12 | length 1124.9
  Top Layer w5: U1.R23@1336.53,1690.99 1338.5,1690.99 v1@1353.4,1676.09 ; v1(1712.13,873.89) 1763.72,822.3 U901.12@1763.72,808.95
  L3_INT_1 w5: v1(1438.1,1077.06) 1584.14,931.02 1654.32,931.02 v1@1711.27,874.07
  Bottom Layer w5: v1(1353.4,1676.57) 1393.7,1676.57 1413.79,1656.48 1413.79,1100.35 v1@1437.43,1076.71
YELLOW: R310.2 U1.P5 | length 2709.5
  Top Layer w5: v12@1353.12,2269.68 1364.88,2257.92 U1.P5@1368.02,2257.92
  L6_INT_2 w5: v12(1352.42,2270.37) 1370.55,2252.24 1370.55,2214.04 1390.01,2194.58 1594.54,2194.58 v12@1605.26,2183.86
  Bottom Layer w5: R310.2@253.47,2513.36 280.28,2513.36 314.2,2547.28 314.2,2607.25 381.49,2674.54 867.6,2674.54 901.47,2640.67 901.47,2616.53 930.1,2587.9 1019.65,2587.9 1073.46,2534.09 1139.34,2534.09 1154.87,2549.62 1154.87,2613.17 1171.98,2630.28 1479.25,2630.28 1505.75,2603.78 1505.75,2461.05 1528.79,2438.01 1790.67,2438.01 1813.25,2415.43 1813.25,2385.04 1796.36,2368.15 1726.12,2368.15 1714.7,2356.73 1714.7,2329.5 1702.96,2317.76 1676.11,2317.76 1675.86,2317.51 ; v12(1605.35,2183.07) 1620.46,2198.18 1620.46,2289.52 1648.45,2317.51 1675.86,2317.51 ; 1679.48,2317.51 1675.86,2317.51
pads on no net: "battery out.2" "battery out.3" "battery out.4" "battery out.S1" "battery out.S2" "battery out.S3" "battery out.S4" "J507. " batterycharging.0 batterycharging.2 batterycharging.3 J505.4 J509.4 J519.1 J519.2 J519.3 J519.4 SW2.3 SW3.3 SW4.3 SW5.3 U1.A2 U1.A3 U1.A9 U1.A10 U1.A11 U1.A12 U1.A14 U1.A16 U1.A19 U1.A21 U1.A24 U1.AA1 U1.AA2 U1.AA3 U1.AA4 U1.AA11 U1.AA17 U1.AA18 U1.AA20 U1.AA21 U1.AA23 U1.AA24 U1.AA25 U1.AB1 U1.AB2 U1.AB17 U1.AB18 U1.AB19 U1.AB20 U1.AB21 U1.AB22 U1.AB23 U1.AB25 U1.AC18 U1.AC19 U1.AC20 U1.AC21 U1.AC22 U1.AC23 U1.AC24 U1.AC25 U1.AD15 U1.AD17 U1.AD18 U1.AD20 U1.AD21 U1.AD23 U1.AD24 U1.AD25 U1.AE15 U1.AE18 U1.AE19 U1.AE20 U1.AE21 U1.AE22 U1.AE23 U1.AE24 U1.B1 U1.B2 U1.B3 U1.B8 U1.B9 U1.B10 U1.B11 U1.B12 U1.B14 U1.B16 U1.B18 U1.B21 U1.B23 U1.B24 U1.B25 U1.C5 U1.C7 U1.C8 U1.C14 U1.C15 U1.C16 U1.C18 U1.C20 U1.C22 U1.C23 U1.C24 U1.D1 U1.D2 U1.D5 U1.D7 U1.D10 U1.D12 U1.D16 U1.D20 U1.D21 U1.D22 U1.D23 U1.E1 U1.E2 U1.E3 U1.E4 U1.E10 U1.E15 U1.E17 U1.E19 U1.E21 U1.E22 U1.E23 U1.F1 U1.F2 U1.F3 U1.F4 U1.F10 U1.F15 U1.F18 U1.F20 U1.F21 U1.F23 U1.F24 U1.F25 U1.G1 U1.G2 U1.G7 U1.G8 U1.G12 U1.G13 U1.G20 U1.G21 U1.G24 U1.G25 U1.H1 U1.H2 U1.H3 U1.H4 U1.H7 U1.H19 U1.H20 U1.H22 U1.H23 U1.H24 U1.J1 U1.J3 U1.J4 U1.J5 U1.J6 U1.J21 U1.J22 U1.J23 U1.J24 U1.K1 U1.K2 U1.K3 U1.K4 U1.K5 U1.K6 U1.K20 U1.K21 U1.K22 U1.K23 U1.L6 U1.L7 U1.M4 U1.M5 U1.M6 U1.M7 U1.M25 U1.N2 U1.N12 U1.N19 U1.N20 U1.N21 U1.N22 U1.N25 U1.P1 U1.P3 U1.P4 U1.P20 U1.P21 U1.P22 U1.P23 U1.P24 U1.R1 U1.R19 U1.R20 U1.R22 U1.T20 U1.T21 U1.T22 U1.T25 U1.U1 U1.U2 U1.U3 U1.U4 U1.U20 U1.U21 U1.U22 U1.U23 U1.U24 U1.U25 U1.V1 U1.V2 U1.V3 U1.V4 U1.V20 U1.V21 U1.V22 U1.V23 U1.V24 U1.V25 U1.W1 U1.W2 U1.W20 U1.W21 U1.W22 U1.W23 U1.W24 U1.W25 U1.Y1 U1.Y2 U1.Y3 U1.Y4 U1.Y17 U1.Y18 U1.Y19 U1.Y20 U1.Y21 U1.Y22 U1.Y23 U1.Y25 U2.1 U3.J1 U3.J9 U3.L1 U3.L9 U4.1 U5.J1 U5.J9 U5.L1 U5.L9 U7.E3 U7.E6 U7.E7 U7.F7 U8.33 U15.5 U22.3 U22.5 U22.6 U22.7 U22.8 U22.10 U22.11 U22.12 U22.13 U22.23 U22.25 U22.27 U22.28 U22.29 U22.31 U22.32 U512A.A1 U512A.A2 U512A.A6 U512A.A7 U512A.A8 U512A.A9 U512A.A10 U512A.A11 U512A.A12 U512A.A13 U512A.A14 U512A.B1 U512A.B7 U512A.B8 U512A.B9 U512A.B10 U512A.B11 U512A.B12 U512A.B13 U512A.B14 U512A.C1 U512A.C3 U512A.C5 U512A.C7 U512A.C8 U512A.C9 U512A.C10 U512A.C11 U512A.C12 U512A.C13 U512A.C14 U512A.D1 U512A.D2 U512A.D3 U512A.D4 U512A.D12 U512A.D13 U512A.D14 U512A.E1 U512A.E2 U512A.E3 U512A.E5 U512A.E8 U512A.E9 U512A.E10 U512A.E12 U512A.E13 U512A.E14 U512A.F1 U512A.F2 U512A.F3 U512A.F10 U512A.F12 U512A.F13 U512A.F14 U512A.G1 U512A.G2 U512A.G3 U512A.G10 U512A.G12 U512A.G13 U512A.G14 U512A.H1 U512A.H2 U512A.H3 U512A.H5 U512A.H12 U512A.H13 U512A.H14 U512A.J1 U512A.J2 U512A.J3 U512A.J5 U512A.J12 U512A.J13 U512A.J14 U512A.K1 U512A.K2 U512A.K3 U512A.K5 U512A.K6 U512A.K7 U512A.K10 U512A.K12 U512A.K13 U512A.K14 U512A.L1 U512A.L2 U512A.L3 U512A.L12 U512A.L13 U512A.L14 U512A.M1 U512A.M2 U512A.M3 U512A.M7 U512A.M8 U512A.M9 U512A.M10 U512A.M11 U512A.M12 U512A.M13 U512A.M14 U512A.N1 U512A.N3 U512A.N6 U512A.N7 U512A.N8 U512A.N9 U512A.N10 U512A.N11 U512A.N12 U512A.N13 U512A.N14 U512A.P1 U512A.P2 U512A.P7 U512A.P8 U512A.P9 U512A.P10 U512A.P11 U512A.P12 U512A.P13 U512A.P14 U901.4 U901.5 U901.8 U901.25 U901.26 U901.27 U901.28 U901.29 U901.30 U901.32 U901.35 U901.37 U901.38 U901.39 U901.40 U901.45 U901.46 U901.47 U902.4 X900.1

## Polygon pours and split planes (outlines as drawn)
NetC697_2 on Bottom Layer "Bottom Layer-No Net" (solid, remove dead copper, pour order 1001): 53.47,4505.9 216.47,4505.9 284.47,4437.9 284.47,4077.9 263.47,4056.9 238.47,4031.9 53.47,4031.9 53.47,4507.9
NetC766_2 on Bottom Layer "Bottom Layer-No Net" (solid, remove dead copper, pour order 1000): 59.47,4008.9 228.47,4008.9 255.47,3981.9 261.47,3975.9 261.47,3658.9 153.47,3550.9 58.47,3550.9 59.47,3551.9 59.47,4008.9
GND_ANALOG on Bottom Layer "Bottom Layer-No Net" (solid, remove dead copper, pour order 1000): 817.73,4125.37 2739.48,4125.37 2997.95,3866.9 2997.95,3661.69 2998.68,3660.96 3030.07,3629.57 3326.75,3629.57 3326.75,3033.89 3299.82,3006.96 2955.86,3006.96 2955.29,3006.39 2888.43,3073.25 2888.43,3076.66 2888.43,3344.84 2742.13,3491.14 1944.81,3491.14 1911.28,3457.61 791.74,3457.61 719.99,3529.36 719.99,4028.3 816.7,4125.01
GND on Bottom Layer "Bottom Layer-No Net" (solid, remove dead copper, pour order 1001): 1118.21,907.65 2030.95,907.65 2178.34,760.26 2224.43,714.17 2224.43,24.53 910.26,24.53 910.11,24.38 910.11,679.65 910.11,700.19 1118.05,908.13
GND_ANALOG on Top Layer "Bottom Layer-No Net" (solid, remove dead copper, pour order 1002): 816.73,4125.12 2739.22,4125.12 2773.34,4091 2875.92,3988.42 2945.04,3988.42 2957.51,3988.42 2997.18,3948.75 2996.87,3948.44 2996.87,3661.49 3029.17,3629.19 3326.84,3629.19 3326.84,3033.92 3300.17,3007.25 2955.43,3007.25 2888.98,3073.7 2888.98,3343.77 2889.19,3343.98 2742.77,3490.4 2263.29,3490.4 1943.06,3490.4 1910.72,3458.06 792.72,3458.06 722.43,3528.35 722.43,4029.31 817.62,4124.5
GND on Top Layer "Bottom Layer-No Net" (solid, remove dead copper, pour order 1003): 1117.97,907.23 2043.83,907.23 2207.51,728.67 2224.3,710.35 2224.3,6.74 913.92,6.74 909.17,11.92 909.17,678.98 1118.39,907.22
GND on L2_GND_1 (split plane): 3312.62,33.36 36.22,33.36 36.22,4808.32 3312.62,4808.32
GEN_3V3 on L7_PWR_2 (split plane): 3312.62,4163.95 2938.56,4163.95 2936.61,4163.56 2934.96,4162.45 2933.85,4160.8 2933.46,4158.85 2933.46,466.31 2933.85,464.36 2934.96,462.71 2935.54,462.13 2937.19,461.02 2939.14,460.63 3312.62,460.63 3312.62,33.36 36.22,33.36 36.22,1203.39 1207.69,1203.39 1209.4,1203.73 1239.89,1203.73 1241.84,1204.12 1243.49,1205.23 1245.97,1207.71 1247.08,1209.36 1247.47,1211.31 1247.47,1796.33 1301.49,1796.33 1301.49,1784.37 1301.88,1782.42 1302.99,1780.77 1304.64,1779.66 1306.59,1779.27 1860.5,1779.27 1862.45,1779.66 1864.1,1780.77 1865.21,1782.42 1865.6,1784.37 1865.6,1932.03 2064.71,1932.03 2066.37,1931.7 2215.46,1931.7 2217.41,1932.09 2219.06,1933.2 2220.17,1934.85 2220.56,1936.8 2220.56,2242.33 2220.17,2244.28 2219.06,2245.93 2217.41,2247.04 2215.46,2247.43 2142.1,2247.43 2142.1,2675.64 2141.71,2677.59 2140.6,2679.24 2138.95,2680.35 2137,2680.74 1845.15,2680.74 1843.2,2680.35 1841.55,2679.24 1840.44,2677.59 1840.05,2675.64 1840.05,2600.15 1813.83,2600.15 1813.83,3568.01 1813.44,3569.96 1812.33,3571.61 1810.68,3572.72 1808.73,3573.11 1374.12,3573.11 1374.12,3647.09 1374.18,3647.39 1374.18,3651.15 1374.21,3651.3 1374.18,3651.45 1374.18,3694.8 2395.43,3694.8 2395.43,2401.01 2395.82,2399.06 2396.93,2397.41 2398.58,2396.3 2400.53,2395.91 2552.73,2395.91 2552.73,2245.83 2553.12,2243.88 2554.23,2242.23 2555.88,2241.12 2557.83,2240.73 2703.02,2240.73 2704.33,2240.47 2726.13,2240.47 2728.08,2240.86 2729.73,2241.97 2730.84,2243.62 2731.23,2245.57 2731.23,2316.26 2731.09,2316.96 2731.09,2479.58 2730.7,2481.53 2729.59,2483.18 2727.94,2484.29 2725.99,2484.68 2456.79,2484.68 2456.79,3707.78 2456.69,3708.28 2456.69,4041.76 2456.3,4043.71 2455.19,4045.36 2453.54,4046.47 2451.59,4046.86 888.88,4046.86 886.93,4046.47 885.28,4045.36 884.17,4043.71 883.78,4041.76 883.78,3866.81 883.94,3866.01 883.94,3506.38 516.98,3506.38 515.03,3505.99 513.38,3504.88 512.27,3503.23 511.88,3501.28 511.88,3396.33 36.22,3396.33 36.22,4808.32 3312.62,4808.32
DDR_1V5 on L7_PWR_2 (split plane): 813.42,3277.12 813.42,3044.13 691.87,3044.13 689.92,3043.74 688.27,3042.63 687.16,3040.98 686.77,3039.03 686.77,2964.05 687.16,2962.1 688.27,2960.45 689.92,2959.34 691.87,2958.95 817.81,2958.95 817.81,2662.7 818.2,2660.75 819.31,2659.1 820.96,2657.99 822.91,2657.6 1030.39,2657.6 1030.39,2469.55 616.11,2469.55 616.11,3081.22 754.14,3081.22 756.09,3081.61 757.74,3082.72 758.85,3084.37 759.24,3086.32 759.24,3199.62 758.85,3201.57 757.74,3203.22 756.09,3204.33 754.14,3204.72 476.94,3204.72 474.99,3204.33 473.34,3203.22 472.23,3201.57 471.84,3199.62 471.84,2380.52 472.23,2378.57 473.34,2376.92 474.99,2375.81 476.94,2375.42 617.21,2375.42 617.21,2197.01 544.23,2197.01 544.23,2281.66 543.84,2283.61 542.73,2285.26 541.08,2286.37 539.13,2286.76 440.15,2286.76 438.2,2286.37 436.55,2285.26 435.44,2283.61 435.05,2281.66 435.05,2143.87 435.44,2141.92 436.55,2140.27 438.2,2139.16 440.15,2138.77 519.66,2138.77 519.66,1608.15 444.08,1608.15 442.13,1607.76 440.48,1606.65 439.37,1605 438.98,1603.05 438.98,1437.67 439.37,1435.72 440.48,1434.07 442.13,1432.96 444.08,1432.57 446.03,1432.96 446.05,1432.97 520.34,1432.97 522.19,1433.34 522.93,1433.19 606.71,1433.19 608.66,1433.58 610.31,1434.69 611.42,1436.34 611.81,1438.29 611.81,2039.83 724.71,2039.83 726.66,2040.22 728.31,2041.33 729.42,2042.98 729.81,2044.93 729.81,2160.21 1137.11,2160.21 1139.06,2160.6 1140.71,2161.71 1141.82,2163.36 1142.21,2165.31 1142.21,2199.82 1241.78,2199.82 1242.09,2199.61 1242.09,1942.73 1242.48,1940.78 1243.59,1939.13 1245.24,1938.02 1247.19,1937.63 1301.49,1937.63 1301.49,1806.53 1244.5,1806.53 1242.55,1806.14 1241.53,1805.46 1240.42,1805.24 1238.77,1804.13 1237.66,1802.48 1237.27,1800.53 1237.27,1213.93 1204.64,1213.93 1202.93,1213.59 36.22,1213.59 36.22,3386.13 813.42,3386.13
5V_IN on L7_PWR_2 (split plane): 3312.62,470.83 2943.66,470.83 2943.66,4153.75 3312.62,4153.75
GEN_1V8 on L7_PWR_2 (split plane): 2446.49,3704.81 2446.32,3703.96 2446.59,3702.6 2446.59,2479.58 2446.98,2477.63 2448.09,2475.98 2449.74,2474.87 2451.69,2474.48 2720.89,2474.48 2720.89,2316.26 2721.03,2315.56 2721.03,2250.67 2704.9,2250.67 2703.59,2250.93 2562.93,2250.93 2562.93,2399.55 2563.22,2401.01 2562.83,2402.96 2561.72,2404.61 2560.07,2405.72 2558.12,2406.11 2405.63,2406.11 2405.63,3698.92 2405.24,3700.87 2404.65,3701.76 2404.63,3701.85 2403.52,3703.5 2401.87,3704.61 2399.92,3705 1370.3,3705 1368.35,3704.61 1366.7,3703.5 1365.48,3702.28 1364.37,3700.63 1363.98,3698.68 1363.98,3651.51 1363.92,3651.21 1363.92,3568.01 1364.31,3566.06 1365.42,3564.41 1367.07,3563.3 1369.02,3562.91 1803.63,3562.91 1803.63,2600.15 1561.78,2600.15 1561.78,3447.69 1561.39,3449.64 1560.28,3451.29 1558.63,3452.4 1556.68,3452.79 1335.26,3452.79 1333.31,3452.4 1333.19,3452.32 1307.24,3452.32 1307.24,3801.6 2396.8,3801.6 2398.75,3801.99 2400.4,3803.1 2401.51,3804.75 2401.9,3806.7 2401.9,3959.97 2401.51,3961.92 2400.4,3963.57 2398.75,3964.68 2396.8,3965.07 1002.26,3965.07 1000.31,3964.68 998.66,3963.57 997.55,3961.92 997.16,3959.97 997.16,3808.02 996.97,3807.06 996.97,3395.43 825.88,3395.43 825.11,3395.94 823.16,3396.33 522.08,3396.33 522.08,3496.18 889.04,3496.18 890.99,3496.57 892.64,3497.68 893.75,3499.33 894.14,3501.28 894.14,3868.98 893.98,3869.78 893.98,4036.66 2446.49,4036.66
SYS_4V2 on L7_PWR_2 (split plane): 2391.7,3811.8 1302.14,3811.8 1300.19,3811.41 1298.54,3810.3 1297.43,3808.65 1297.04,3806.7 1297.04,3447.27 1297.03,3447.22 1297.03,3103.43 1297.22,3102.47 1297.22,3019.72 1297.41,3018.76 1297.41,2834.58 1222.43,2834.58 1222.43,3078.25 1245.65,3078.25 1247.6,3078.64 1249.25,3079.75 1250.36,3081.4 1250.75,3083.35 1250.75,3188.19 1250.36,3190.14 1249.25,3191.79 1247.6,3192.9 1245.65,3193.29 1225.9,3193.29 1225.9,3268.86 1226.06,3269.1 1226.45,3271.05 1226.06,3273 1224.95,3274.65 1223.3,3275.76 1221.35,3276.15 1075.76,3276.15 1073.81,3275.76 1072.16,3274.65 1071.05,3273 1070.66,3271.05 1070.8,3270.37 1070.54,3270.19 1069.43,3268.54 1069.04,3266.59 1069.04,3120.83 1069.43,3118.88 1070.54,3117.23 1072.19,3116.12 1074.14,3115.73 1137.92,3115.73 1137.92,2678.78 1138.17,2677.52 1138.17,2667.85 1032.12,2667.85 1031.87,2667.8 828.01,2667.8 828.01,2964.05 827.62,2966 826.51,2967.65 824.86,2968.76 822.91,2969.15 696.97,2969.15 696.97,3033.93 818.52,3033.93 820.47,3034.32 822.12,3035.43 823.23,3037.08 823.62,3039.03 823.62,3277.12 823.62,3385.23 1002.07,3385.23 1004.02,3385.62 1005.67,3386.73 1006.78,3388.38 1007.17,3390.33 1007.17,3804.36 1007.36,3805.32 1007.36,3954.87 2391.7,3954.87
VDDCORE on L7_PWR_2 (split plane): 1551.58,2595.05 1551.97,2593.1 1553.08,2591.45 1554.73,2590.34 1556.68,2589.95 1806.33,2589.95 1806.78,2589.65 1808.73,2589.26 1810.68,2589.65 1811.13,2589.95 1843.89,2589.95 1845.15,2589.7 1846.41,2589.95 2061.27,2589.95 2061.27,1942.23 1402.77,1942.23 1402.77,2166.52 1515.64,2166.52 1515.64,2016.66 1516.03,2014.71 1517.14,2013.06 1518.79,2011.95 1520.74,2011.56 1909.92,2011.56 1910.12,2011.6 1972.83,2011.6 1974.78,2011.99 1976.43,2013.1 1977.54,2014.75 1977.93,2016.7 1977.93,2124.52 1977.54,2126.47 1976.43,2128.12 1974.78,2129.23 1972.83,2129.62 1724.45,2129.62 1724.45,2223.89 1724.73,2224.31 1725.12,2226.26 1724.73,2228.21 1723.62,2229.86 1722.96,2230.31 1722.95,2230.31 1721.3,2231.42 1719.35,2231.81 1592.98,2231.81 1592.08,2231.63 1417.46,2231.63 1417.46,2431.43 1417.82,2431.97 1418.21,2433.92 1417.82,2435.87 1416.71,2437.52 1415.06,2438.63 1413.11,2439.02 1411.16,2438.63 1411.14,2438.62 1307.61,2438.62 1307.61,3019.72 1307.42,3020.68 1307.42,3103.43 1307.23,3104.39 1307.23,3442.12 1333.46,3442.12 1334.61,3442.35 1334.95,3442.28 1336.51,3442.59 1551.58,3442.59
DDR_VREF on L7_PWR_2 (split plane): 749.04,3091.42 611.01,3091.42 609.06,3091.03 607.41,3089.92 606.3,3088.27 605.91,3086.32 605.91,2464.45 606.3,2462.5 607.41,2460.85 609.06,2459.74 611.01,2459.35 1132.01,2459.35 1132.01,2170.41 724.71,2170.41 722.76,2170.02 721.11,2168.91 720,2167.26 719.61,2165.31 719.61,2050.03 606.71,2050.03 604.76,2049.64 603.11,2048.53 602,2046.88 601.61,2044.93 601.61,1443.39 523.9,1443.39 522.69,1443.63 520.74,1443.24 520.56,1443.12 520.34,1443.17 449.18,1443.17 449.18,1597.95 524.76,1597.95 526.71,1598.34 528.36,1599.45 529.47,1601.1 529.86,1603.05 529.86,2143.87 529.47,2145.82 528.36,2147.47 526.71,2148.58 524.76,2148.97 445.25,2148.97 445.25,2276.56 534.03,2276.56 534.03,2191.91 534.42,2189.96 535.53,2188.31 537.18,2187.2 539.13,2186.81 620.69,2186.81 622.64,2187.2 624.29,2188.31 624.44,2188.52 625.91,2189.51 627.02,2191.16 627.41,2193.11 627.41,2380.52 627.02,2382.47 625.91,2384.12 624.26,2385.23 622.31,2385.62 621.63,2385.48 620.96,2385.62 482.04,2385.62 482.04,3194.52 749.04,3194.52
VDDSOC on L7_PWR_2 (split plane): 1215.7,3189.25 1216.09,3187.3 1216.44,3186.77 1216.55,3186.24 1217.66,3184.59 1219.31,3183.48 1221.26,3183.09 1240.55,3183.09 1240.55,3088.45 1219.79,3088.45 1218.93,3089.02 1216.98,3089.41 1215.03,3089.02 1213.38,3087.91 1212.27,3086.26 1211.88,3084.31 1212.23,3082.55 1212.23,2829.48 1212.62,2827.53 1213.73,2825.88 1215.38,2824.77 1217.33,2824.38 1297.41,2824.38 1297.41,2433.52 1297.8,2431.57 1298.91,2429.92 1300.56,2428.81 1302.51,2428.42 1407.26,2428.42 1407.26,2231.63 1406.7,2231.63 1405.85,2231.46 1334.88,2231.46 1332.93,2231.07 1331.28,2229.96 1330.17,2228.31 1329.78,2226.36 1329.78,2190.55 1330.17,2188.6 1331.28,2186.95 1332.93,2185.84 1334.88,2185.45 1392.57,2185.45 1392.57,1937.13 1392.96,1935.18 1394.07,1933.53 1395.72,1932.42 1397.67,1932.03 1582.04,1932.03 1582.04,1856.45 1311.69,1856.45 1311.69,1942.73 1311.3,1944.68 1310.19,1946.33 1308.54,1947.44 1306.59,1947.83 1252.29,1947.83 1252.29,1996.56 1302.86,1996.56 1304.81,1996.95 1306.46,1998.06 1307.57,1999.71 1307.96,2001.66 1307.96,2129.6 1307.57,2131.55 1306.46,2133.2 1304.81,2134.31 1302.86,2134.7 1252.29,2134.7 1252.29,2204.73 1251.9,2206.68 1250.79,2208.33 1249.14,2209.44 1247.19,2209.83 1246.54,2209.7 1244.96,2210.01 1142.21,2210.01 1142.21,2463.32 1142.1,2463.89 1142.21,2464.45 1141.82,2466.4 1140.71,2468.05 1139.06,2469.16 1137.11,2469.55 1040.59,2469.55 1040.59,2657.65 1143.27,2657.65 1145.22,2658.04 1146.87,2659.15 1147.98,2660.8 1148.37,2662.75 1148.37,2678.53 1148.12,2679.79 1148.12,3120.83 1147.73,3122.78 1146.62,3124.43 1144.97,3125.54 1143.02,3125.93 1079.24,3125.93 1079.24,3265.95 1215.7,3265.95
GEN_2V5 on L7_PWR_2 (split plane): 2131.9,2242.33 2132.29,2240.38 2133.4,2238.73 2135.05,2237.62 2137,2237.23 2210.36,2237.23 2210.36,1941.9 2071.47,1941.9 2071.47,2595.05 2071.08,2597 2069.97,2598.65 2068.32,2599.76 2066.37,2600.15 1850.25,2600.15 1850.25,2670.54 2131.9,2670.54
NVCC_3V3 on L7_PWR_2 (split plane): 1855.4,1789.47 1311.69,1789.47 1311.69,1846.25 1587.14,1846.25 1589.09,1846.64 1590.74,1847.75 1591.85,1849.4 1592.24,1851.35 1592.24,1932.03 1855.4,1932.03
GEN_2V5 on L7_PWR_2 (split plane): 1588.61,2070.41 1589,2068.46 1590.11,2066.81 1591.76,2065.7 1593.71,2065.31 1719.35,2065.31 1721.3,2065.7 1722.95,2066.81 1724.06,2068.46 1724.45,2070.41 1724.45,2119.42 1967.73,2119.42 1967.73,2021.8 1909.96,2021.8 1909.76,2021.76 1525.84,2021.76 1525.84,2166.52 1588.61,2166.52
NVCC_3V3 on L7_PWR_2 (split plane): 1714.25,2075.51 1598.81,2075.51 1598.81,2171.62 1598.42,2173.57 1597.31,2175.22 1595.66,2176.33 1593.71,2176.72 1402.77,2176.72 1402.77,2190.55 1402.38,2192.5 1401.27,2194.15 1399.62,2195.26 1397.67,2195.65 1339.98,2195.65 1339.98,2221.26 1406.83,2221.26 1407.68,2221.43 1603.11,2221.43 1604.01,2221.61 1714.25,2221.61
VDDSOC_CAP on L7_PWR_2 (split plane): 1297.76,2006.76 1252.29,2006.76 1252.29,2124.5 1297.76,2124.5

## Keep-outs
Keep-Out Layer:
  circle w5: c176,4672.55 r118
  circle w5: c3185.02,4673.75 r118
  circle w5: c181.45,241.75 r118
  lines w5: 3301.42,239.21 cw(c3183.42,239.21) 3301.41,240.81
  lines w6: -33.42,67.74 -143.01,177.33 -143.01,4669.28 16.86,4829.15 ; -33.23,68.33 -33.23,66.84 15.49,18.12 15.49,4829.01 3333.87,4829.01 3333.87,17.63 15.49,17.63 ; 3333.5,17.2 3333.5,18.69 3491.03,176.22 3491.03,4670.74 3334.03,4827.74

## Other copper
Top Layer:
  pour cut-out: 1654.93,3709.33 1696.95,3709.33 1716.18,3690.1 1716.18,3629.19 1704.08,3617.09 1658.85,3617.09 1625.02,3650.92 1625.02,3678 1654.57,3707.55
  pour cut-out: 1620.84,3799.82 1665.75,3799.82 1680.21,3785.36 1680.21,3737.14 1671.33,3728.26 1598.51,3728.26 1598.51,3728.51 1568.31,3758.71 1591.15,3781.55 1613.73,3781.55 1620.84,3788.66
  pour cut-out: 1265.92,3910.38 1266.21,3910.67 1291.95,3910.67 1289.48,3908.2 1289.48,3850.45 1271.89,3832.86 1258.08,3832.86 1233.36,3857.58 1233.36,3878.93 1234.9,3878.93 1266.45,3910.48
Bottom Layer:
  pour cut-out: 1605.47,3560.9 1695.47,3560.9 1741.47,3559.9 1719.47,3531.9 1709.47,3521.9 1605.47,3521.9
  pour cut-out: 1704.58,3560.95 1760.13,3560.95 1776.73,3544.35 1736.15,3503.77 1653.35,3503.77 1653.35,3509.9 1704.04,3560.59